# EAGLE board mono main V3 (EAGLE 7.4.0)
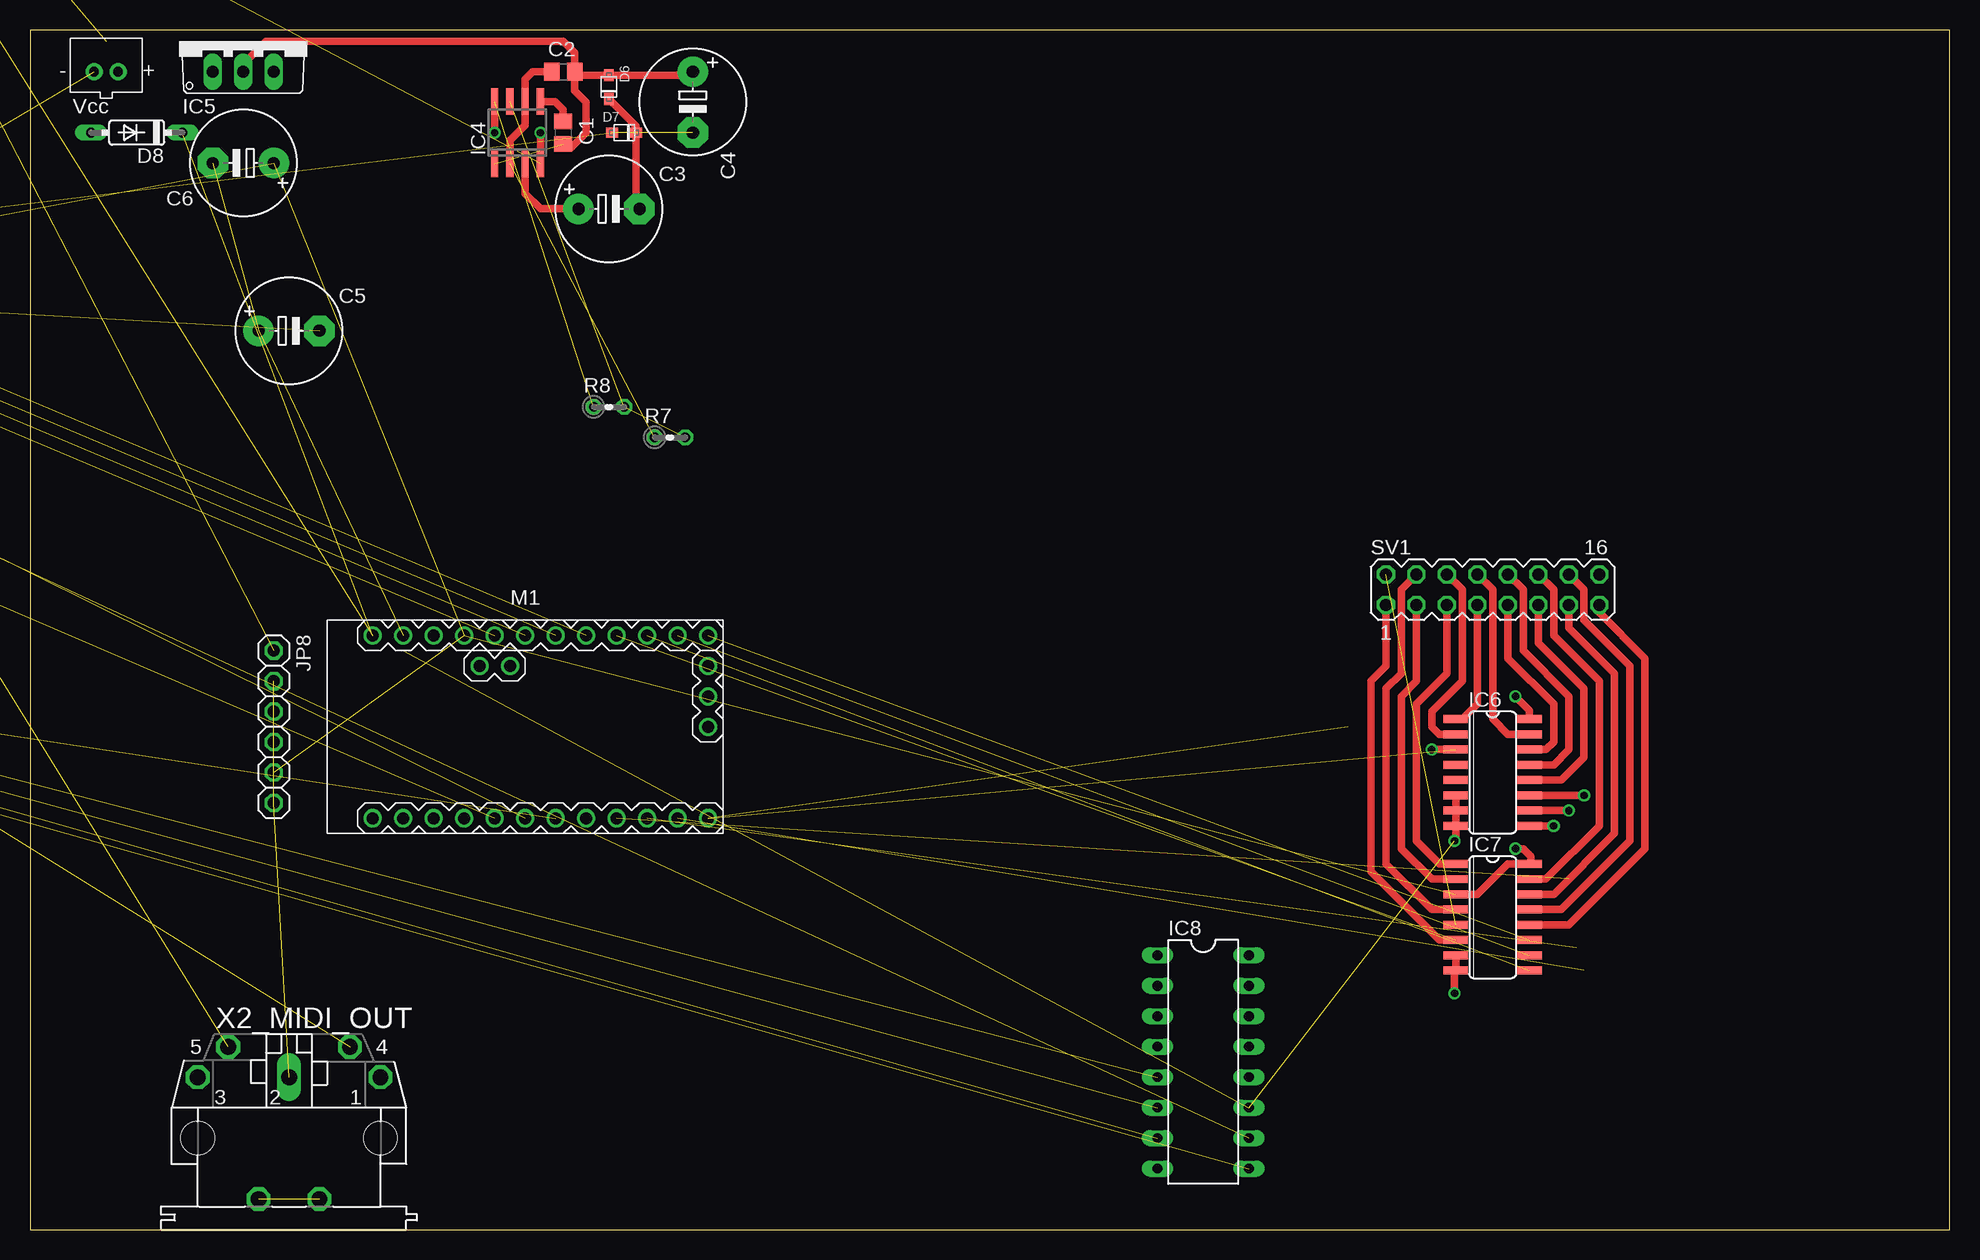
[diagram p0: board, top side]
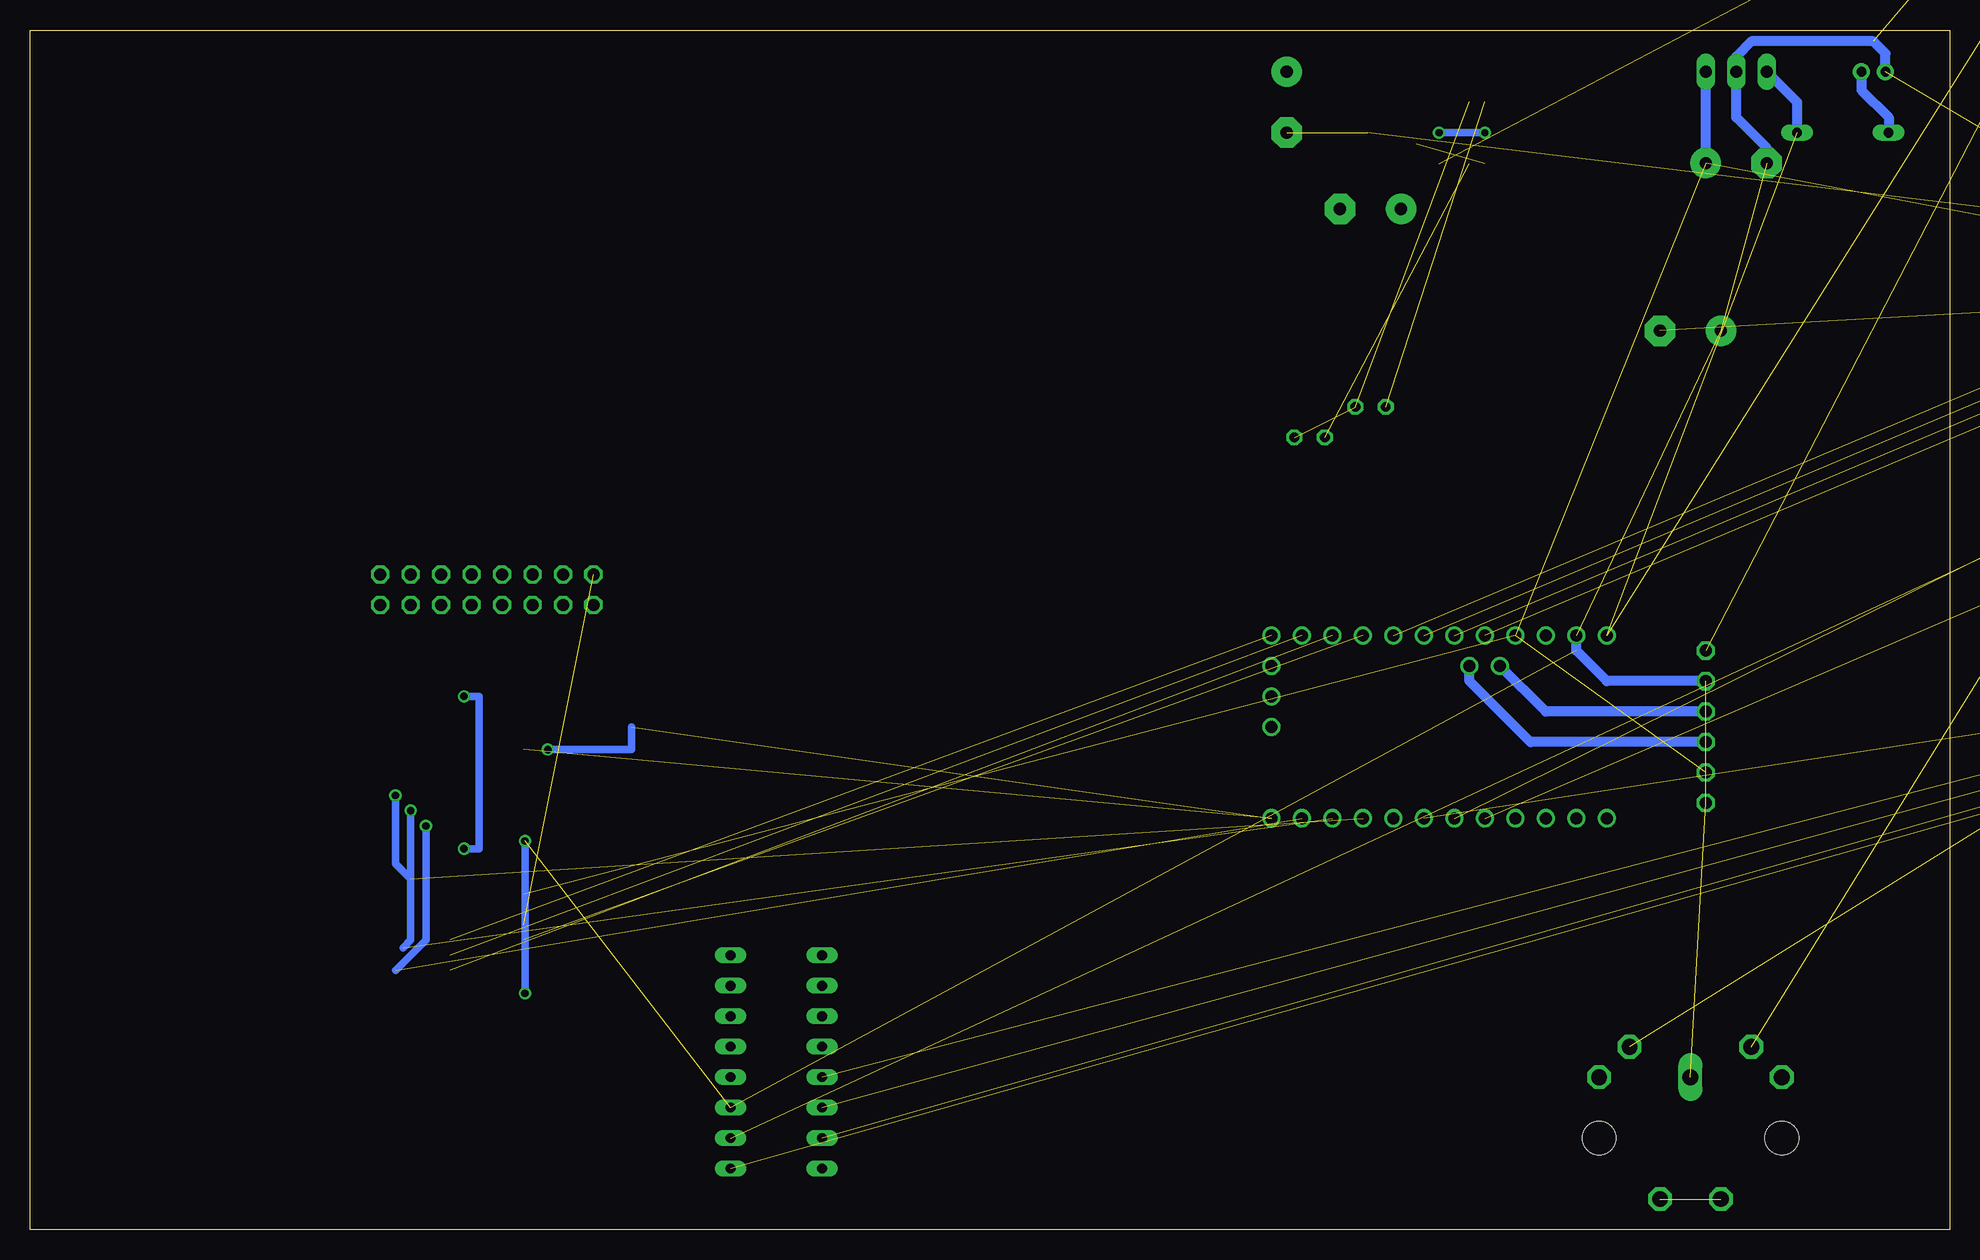
[diagram p1: board, bottom side, seen from below]

Size 160 x 100 mm. Coordinates in mm from the lower left corner, seen from the top.
Outline: 0,0 160,0 160,100 0,100 0,0
Copper layers (1*16): Top 0.035mm / dielectric 1.5mm / Bottom 0.035mm
Design rules "default": minimum track width 10mil, minimum drill 24mil, track to track 8mil, track to pad 8mil, pad to pad 8mil, via to via 8mil, smd to smd 8mil, copper to edge 40mil, drill to drill 8mil, minimum pad ring 10mil, minimum via ring 8mil, stop-mask expansion 4mil, vias tented up to drill 0mil, thermal gap 10mil

## Footprints (pad centres in the part's own frame; a part is rotated, then mirrored left to right if it is on the bottom)
C0805 = smd 1.3 x 1.5: 1 -0.95,0; 2 0.95,0
E5-8,5 = drill 1.016 pad 2.54: + -2.54,0 | drill 1.016 pad 2.54 octagon: - 2.54,0
JST-PH-2-THM = drill 0.8 pad 1.422: 1 1,0; 2 -1,0
DO35-7 = drill 0.813 long: A 3.81,0; C -3.81,0
ZDIO-7.5 = drill 0.813 octagon: A 3.81,0; C -3.81,0
SOD-323F = smd 1 x 0.8: A -1,0; C 1,0
SO14 = smd 0.6 x 2.2: 1 -3.81,-2.6; 2 -2.54,-2.6; 3 -1.27,-2.6; 4 0,-2.6; 5 1.27,-2.6; 6 2.54,-2.6; 7 3.81,-2.6; 8 3.81,2.6; 9 2.54,2.6; 10 1.27,2.6; 11 0,2.6; 12 -1.27,2.6; 13 -2.54,2.6; 14 -3.81,2.6
SO08 = smd 0.6 x 2.2: 1 -1.905,-2.6; 2 -0.635,-2.6; 3 0.635,-2.6; 4 1.905,-2.6; 5 1.905,2.6; 6 0.635,2.6; 7 -0.635,2.6; 8 -1.905,2.6
TO220V = drill 1.016 long: 1 -2.54,-2.54; 2 0,-2.54; 3 2.54,-2.54
SO16 = smd 0.66 x 2.032: 1 -4.445,-3.073; 2 -3.175,-3.073; 3 -1.905,-3.073; 4 -0.635,-3.073; 5 0.635,-3.073; 6 1.905,-3.073; 7 3.175,-3.073; 8 4.445,-3.073; 9 4.445,3.073; 10 3.175,3.073; 11 1.905,3.073; 12 0.635,3.073; 13 -0.635,3.073; 14 -1.905,3.073; 15 -3.175,3.073; 16 -4.445,3.073
DIL16 = drill 0.813 long: 1 -8.89,-3.81; 2 -6.35,-3.81; 3 -3.81,-3.81; 4 -1.27,-3.81; 5 1.27,-3.81; 6 3.81,-3.81; 7 6.35,-3.81; 8 8.89,-3.81; 9 8.89,3.81; 10 6.35,3.81; 11 3.81,3.81; 12 1.27,3.81; 13 -1.27,3.81; 14 -3.81,3.81; 15 -6.35,3.81; 16 -8.89,3.81
1X01 = drill 1.016 pad 1.93 octagon: 1 0,0
1X06 = drill 1.016 long: 1 -6.35,0; 2 -3.81,0; 3 -1.27,0; 4 1.27,0; 5 3.81,0; 6 6.35,0
1X02 = drill 1.016 long: 1 -1.27,0; 2 1.27,0
1X06' = drill 1.016 octagon: 1 -6.35,0; 2 -3.81,0; 3 -1.27,0; 4 1.27,0; 5 3.81,0; 6 6.35,0
1X03 = drill 1.016: 1 -2.54,0; 2 0,0; 3 2.54,0
ARDUINO-PRO-MINI#NP = drill 1: J2.1 -1.27,5.08; J2.2 -3.81,5.08; J3.1 15.24,0; J3.2 15.24,2.54; J3.3 15.24,5.08; J6.1 -12.7,7.62; J6.2 -10.16,7.62; J6.3 -7.62,7.62; J6.4 -5.08,7.62; J6.5 -2.54,7.62; J6.6 0,7.62; J6.7 2.54,7.62; J6.8 5.08,7.62; J6.9 7.62,7.62; J6.10 10.16,7.62; J6.11 12.7,7.62; J6.12 15.24,7.62; J7.1 15.24,-7.62; J7.2 12.7,-7.62; J7.3 10.16,-7.62; J7.4 7.62,-7.62; J7.5 5.08,-7.62; J7.6 2.54,-7.62; J7.7 0,-7.62; J7.8 -2.54,-7.62; J7.9 -5.08,-7.62; J7.10 -7.62,-7.62; J7.11 -10.16,-7.62; J7.12 -12.7,-7.62
0204V = drill 0.813 octagon: 1 -1.27,0; 2 1.27,0
0204/7 = drill 0.813 octagon: 1 -3.81,0; 2 3.81,0
0207/10 = drill 0.813 octagon: 1 -5.08,0; 2 5.08,0
MA08-2 = drill 1.016 octagon: 1 -8.89,-1.27; 2 -8.89,1.27; 3 -6.35,-1.27; 4 -6.35,1.27; 5 -3.81,-1.27; 6 -3.81,1.27; 7 -1.27,-1.27; 8 -1.27,1.27; 9 1.27,-1.27; 10 1.27,1.27; 11 3.81,-1.27; 12 3.81,1.27; 13 6.35,-1.27; 14 6.35,1.27; 15 8.89,-1.27; 16 8.89,1.27
6MM = drill 1 pad 1.676 octagon: A -2.5,-2.5; E 2.5,-2.5; S 0,2.5
MAB5SH = drill 1.321 octagon: 1 7.62,5.08; 3 -7.62,5.08; 4 5.08,7.62; 5 -5.08,7.62; PE -2.54,-5.08; PE@ 2.54,-5.08 | drill 1.321 long: 2 0,5.08 | hole 2.794: 7.62,0; -7.62,0

## Placement (x,y rotation side)
C1  [C0805]  44.45,91.44 270 top
C2  [C0805]  44.45,96.52 0 top
C3  47u  [E5-8,5]  48.26,85.09 0 top
C4  47  [E5-8,5]  55.24,93.98 270 top
C5  [E5-8,5]  21.59,74.93 0 top
C6  [E5-8,5]  17.78,88.9 180 top
CN1  Vcc  [JST-PH-2-THM]  6.35,96.52 0 top
D1  1N4148  [DO35-7]  -29.21,67.31 0 top  (outside the outline)
D2  1N4148  [DO35-7]  -41.91,67.31 0 top  (outside the outline)
D3  1N4148  [DO35-7]  -54.61,67.31 0 top  (outside the outline)
D4  1N4148  [DO35-7]  -67.31,67.31 0 top  (outside the outline)
D5  [ZDIO-7.5]  -46.99,78.74 0 top  (outside the outline)
D6  4148  [SOD-323F]  48.26,95.25 270 top
D7  1N4148  [SOD-323F]  49.53,91.44 0 top
D8  4148  [DO35-7]  8.89,91.44 180 top
D9  1N4148  [DO35-7]  -44.45,73.66 0 top  (outside the outline)
D10  1N4148  [DO35-7]  -57.15,73.66 0 top  (outside the outline)
IC3  TL084D  [SO14]  -15.24,121.92 0 top  (outside the outline)
IC4  NE555D  [SO08]  40.64,91.44 0 top
IC5  7805  [TO220V]  17.78,99.06 0 top
IC6  4051D  [SO16]  121.92,38.1 270 top
IC7  4051D  [SO16]  121.92,26.04 270 top
IC8  4040N  [DIL16]  97.79,13.97 270 top
JP1  CK_O  [1X01]  -62.23,59.69 0 top  (outside the outline)
JP2  GATE  [1X01]  -68.58,59.69 0 top  (outside the outline)
JP3  CV  [1X01]  -77.47,59.69 0 top  (outside the outline)
JP4  [1X06]  -26.67,78.74 0 top  (outside the outline)
JP6  [1X02]  -38.1,78.74 0 top  (outside the outline)
JP7  CK_ division_rotor  [1X06]  -58.42,50.8 0 top  (outside the outline)
JP8  DAC  [1X06']  20.32,41.91 270 top
JP9  pitch_bend  [1X03]  -19.05,59.69 0 top  (outside the outline)
JP10  expression  [1X03]  -29.21,59.69 0 top  (outside the outline)
JP11  CV_Bend  [1X01]  -40.64,59.69 0 top  (outside the outline)
JP12  Exp_out  [1X01]  -48.26,59.69 0 top  (outside the outline)
JP13  Bend  [1X01]  -73.66,59.69 0 top  (outside the outline)
JP14  Exp_IN  [1X01]  -55.88,59.69 0 top  (outside the outline)
M1  ARDUINO-PRO-MINI-5.0V#NP  [ARDUINO-PRO-MINI#NP]  41.27,41.91 0 top
R1  330  [0204V]  -66.04,73.66 0 top  (outside the outline)
R2  330  [0204/7]  -30.48,85.09 0 top  (outside the outline)
R3  330  [0204/7]  -40.64,85.09 0 top  (outside the outline)
R4  300  [0204/7]  -50.8,85.09 0 top  (outside the outline)
R5  10k  [0204/7]  -60.96,85.09 0 top  (outside the outline)
R6  1k  [0204/7]  -71.12,85.09 0 top  (outside the outline)
R7  10k  [0204V]  53.34,66.04 0 top
R8  10k  [0204V]  48.26,68.58 0 top
R9  470  [0204V]  -86.36,74.93 0 top  (outside the outline)
R10  100  [0204/7]  -81.28,85.09 0 top  (outside the outline)
R11  10k  [0204V]  -15.24,80.01 0 top  (outside the outline)
R12  10k  [0207/10]  -74.93,78.74 0 top  (outside the outline)
R13  10k  [0207/10]  -19.05,85.09 0 top  (outside the outline)
R14  10k  [0204/7]  -17.78,90.17 0 top  (outside the outline)
R15  10k  [0204/7]  -27.94,90.17 0 top  (outside the outline)
SV1  keyboard connector  [MA08-2]  121.92,53.34 0 top
TM1  [6MM]  -63.5,40.64 0 top  (outside the outline)
TM2  [6MM]  -71.12,40.64 0 top  (outside the outline)
TM3  50k  [6MM]  -40.64,30.48 0 top  (outside the outline)
X2_MIDI_OUT  MAB5SH  [MAB5SH]  21.59,7.62 0 top

## Library data of the parts
C1-C6 R1 R2 R5-R9 R11-R13 = rcl
CN1 D6 D7 JP1-JP3 JP8-JP14 TM1-TM3 = adafruit
D1-D5 D8-D10 = diode
IC3-IC5 = linear
IC6-IC8 = 40xx
JP4 JP6 JP7 = pinhead
M1 = diy-modules
R3 R4 R10 R14 R15 = eagle-ltspice; SPICEMODEL: NONE; SPICEPREFIX: R
SV1 = con-lstb; OC_FARNELL: unknown; OC_NEWARK: unknown
X2_MIDI_OUT = con-hirschmann; OC_FARNELL: 809883; OC_NEWARK: unknown

## Nets
-3V: C5.- D5.A R9.2 TM2.A
AGND: C1.2 C2.2 C4.+ C5.+ C6.- CN1.2 D3.A D4.A D5.C D6.A D10.A IC3.11 IC4.1 IC5.2 IC6.6 IC6.7 IC6.8 IC7.7 IC7.8 IC8.11 JP8.2 JP8.6 JP10.1 M1.J6.2 R5.1 R6.1 R12.1 R13.2 X2_MIDI_OUT.2
ARP_ENABLE: JP4.4 M1.J6.7 R6.2
ARP_MODE: JP4.5 M1.J6.8
CK_I: JP7.1 M1.J7.6
CK_O: D2.A D4.C JP6.2 M1.J7.8 R3.2
CK_RATE: JP4.3 M1.J6.6
CV: IC3.3 JP8.1
GATE: D1.A D3.C M1.J7.7 R4.2
GND: JP4.6
GND.1: M1.J7.9
MIDI_O: M1.J7.12
N$14: R2.1
N$15: JP3.1 R10.2
N$16: JP1.1 R3.1
N$22: IC8.9 JP7.3
N$23: IC8.7 JP7.4
N$24: IC8.6 JP7.5
N$25: IC8.5 JP7.6
N$26: D9.A D10.C IC8.10 JP6.1 JP7.2
N$28: JP2.1 R4.1
N$30: R2.2 X2_MIDI_OUT.5
N$31: R1.1 X2_MIDI_OUT.4
N$33: IC3.9 R13.1 TM3.A
N$40: IC4.7 R7.2 R8.2
N$41: C2.1 IC4.2 IC4.6 R7.1
N$42: C1.1 IC4.5
N$43: IC3.1 IC3.2 R10.1 R15.2
N$44: C3.+ IC4.3
N$45: C3.- D6.C D7.C
N$46: C4.- D7.A R9.1
N$48: IC3.12 JP9.2
N$49: IC3.13 IC3.14 JP13.1 R14.2
N$50: JP9.3 TM1.A
N$51: IC3.10 JP10.2
N$52: IC3.8 JP12.1 TM3.E TM3.S
N$53: CN1.1 D8.A
N$54: JP9.1 TM2.S
N$55: IC3.6 R11.2 R12.2
N$56: IC3.7 JP11.1 R11.1
N$60: IC3.5 R14.1 R15.1
N$61: JP10.3 JP14.1
NC: SV1.16
OCT_SEL: JP4.2 M1.J6.5
PE: X2_MIDI_OUT.PE X2_MIDI_OUT.PE@
R1: IC6.2 SV1.6
R2: IC6.1 SV1.7
R3: IC6.15 SV1.8
R4: IC6.14 SV1.9
R5: IC6.13 SV1.10
R6: IC6.12 SV1.11
R_MUX: IC6.3 M1.J7.1 R5.2
R_MUX_A: IC6.11 M1.J7.4
R_MUX_B: IC6.10 M1.J7.3
R_MUX_C: IC6.9 M1.J7.2
SCK: JP8.3 M1.J2.2
SDA: JP8.4 M1.J2.1
VCC: C6.+ D1.C D2.C D9.C IC5.3 IC6.16 IC7.3 IC7.16 JP4.1 JP8.5 M1.J6.4 R1.2 TM1.S
VCC_RAW: D8.C IC3.4 IC4.4 IC4.8 IC5.1 M1.J6.1 R8.1
VDD: IC8.16
VSS: IC8.8
W1: IC7.6 M1.J6.9 SV1.1
W2: IC7.5 SV1.2
W3: IC7.2 SV1.3
W4: IC7.4 SV1.4
W5: IC7.1 SV1.5
W6: IC7.15 SV1.12
W7: IC7.14 SV1.13
W8: IC7.13 SV1.14
W9: IC7.12 SV1.15
W_MUX: M1.J7.5
W_MUX_A: IC7.11 M1.J6.12
W_MUX_B: IC7.10 M1.J6.11
W_MUX_C: IC7.9 M1.J6.10

## Tracks (layer width: path | path; a pad name or v marks a point on that pad's centre or on a via)
-3V  (3 unrouted)
AGND  (via drill 0.6)  (17 unrouted)
  Top 0.61: C2.2 45.4,94.94 46.35,93.98 46.35,91.44 45.09,90.17 44.77,90.17 C1.2 | C2.2 45.4,98.11 44.45,99.06 19.68,99.06 17.78,97.16 IC5.2 | C2.2 45.67,96.25 D6.A 54.98,96.25 C4.+ | IC6.6 IC6.7 IC6.8 118.85,32.49 v118.75,32.38 | IC7.7 IC7.8 118.75,21.49 v118.75,19.68
  Bottom 0.61: v118.75,32.38 v118.75,19.68
  Bottom 0.813: CN1.2 5.35,98.06 6.35,99.06 16.51,99.06 17.78,97.79 IC5.2 17.78,92.71 15.24,90.17 C6.- | JP8.2 28.57,45.72 31.11,48.26 M1.J6.2
ARP_ENABLE  (2 unrouted)
ARP_MODE  (1 unrouted)
CK_I  (1 unrouted)
CK_O  (4 unrouted)
CK_RATE  (1 unrouted)
CV  (1 unrouted)
GATE  (3 unrouted)
N$15  (1 unrouted)
N$16  (1 unrouted)
N$22  (1 unrouted)
N$23  (1 unrouted)
N$24  (1 unrouted)
N$25  (1 unrouted)
N$26  (4 unrouted)
N$28  (1 unrouted)
N$30  (1 unrouted)
N$31  (1 unrouted)
N$33  (2 unrouted)
N$40  (2 unrouted)
N$41  (1 unrouted)
  Top 0.61: IC4.2 40.01,90.81 41.27,92.08 IC4.6 41.27,95.89 41.91,96.52 C2.1
N$42
  Top 0.61: IC4.5 43.76,94.04 44.45,93.34 C1.1
N$43  (3 unrouted)
N$44
  Top 0.61: IC4.3 41.27,86.36 42.55,85.09 C3.+
N$45
  Top 0.61: D6.C 50.53,91.98 D7.C 50.53,85.36 C3.-
N$46  (2 unrouted)
N$48  (1 unrouted)
N$49  (3 unrouted)
N$50  (1 unrouted)
N$51  (1 unrouted)
N$52  (3 unrouted)
N$53
  Bottom 0.813: CN1.1 7.35,94.98 5.08,92.71 D8.A
N$54  (1 unrouted)
N$55  (2 unrouted)
N$56  (2 unrouted)
N$60  (2 unrouted)
N$61  (1 unrouted)
OCT_SEL  (1 unrouted)
PE  (1 unrouted)
R1
  Top 0.61: SV1.6 119.38,53.34 119.38,45.72 116.84,43.18 116.84,41.91 117.47,41.27 IC6.2
R2
  Top 0.61: SV1.7 120.65,43.81 119.38,42.55 IC6.1
R3
  Top 0.61: SV1.8 121.92,53.34 121.92,42.55 123.19,41.27 IC6.15
R4
  Top 0.61: SV1.9 123.19,47.62 127,43.81 127,40.64 126.36,40.01 IC6.14
R5
  Top 0.61: SV1.10 124.46,53.34 124.46,48.26 128.27,44.45 128.27,40.01 127,38.73 IC6.13
R6
  Top 0.61: SV1.11 125.73,48.9 129.54,45.09 129.54,39.37 127.64,37.47 IC6.12
R_MUX  (via drill 0.6)  (2 unrouted)
  Top 0.61: IC6.3 v116.84,40.01
  Bottom 0.61: v116.84,40.01 109.86,40.01 109.86,41.91
R_MUX_A  (via drill 0.6)  (1 unrouted)
  Top 0.61: IC6.11 v129.54,36.2
  Bottom 0.61: v129.54,36.2 129.54,30.48 128.27,29.21
R_MUX_B  (via drill 0.6)  (1 unrouted)
  Top 0.61: IC6.10 v128.27,34.92
  Bottom 0.61: v128.27,34.92 128.27,24.13 128.91,23.5
R_MUX_C  (via drill 0.6)  (1 unrouted)
  Top 0.61: IC6.9 v127,33.66
  Bottom 0.61: v127,33.66 127,24.13 129.54,21.59
SCK
  Bottom 0.813: JP8.3 33.66,43.18 M1.J2.2
SDA
  Bottom 0.813: JP8.4 34.92,40.64 40.01,45.72 M1.J2.1
VCC  (via drill 0.6)  (9 unrouted)
  Top 0.61: IC6.16 124.99,43.28 v123.83,44.45 | v123.83,31.75 124.46,31.75 125.09,31.11 125.09,30.58 IC7.16 123.19,30.48 120.65,27.94 IC7.3
  Bottom 0.61: v123.83,44.45 122.56,44.45 122.56,31.75 v123.83,31.75
  Bottom 0.813: C6.+ IC5.3
VCC_RAW  (via drill 0.6)  (4 unrouted)
  Top 0.61: IC4.8 v38.73,91.44 | v42.55,91.44 IC4.4
  Bottom 0.61: v38.73,91.44 v42.55,91.44
  Bottom 0.813: D8.C 12.7,93.98 IC5.1
W1  (1 unrouted)
  Top 0.61: SV1.1 113.03,46.99 111.76,45.72 111.76,29.84 117.47,24.13 IC7.6
W2  (1 unrouted)
W3
  Top 0.61: IC7.2 116.84,29.21 114.3,31.75 114.3,44.45 115.57,45.72 SV1.3
W4
  Top 0.61: SV1.4 114.3,53.34 114.3,46.35 113.03,45.09 113.03,30.48 116.84,26.67 IC7.4
W5
  Top 0.61: SV1.5 118.11,46.35 115.57,43.81 115.57,32.38 117.47,30.48 IC7.1
W6
  Top 0.61: SV1.12 127,53.34 127,49.53 130.81,45.72 130.81,33.66 126.36,29.21 IC7.15
W7
  Top 0.61: SV1.13 128.27,50.16 132.08,46.35 132.08,33.02 127,27.94 IC7.14
W8
  Top 0.61: IC7.13 127.64,26.67 133.35,32.38 133.35,46.99 129.54,50.8 129.54,53.34 SV1.14
W9
  Top 0.61: SV1.15 130.81,51.44 134.62,47.62 134.62,31.75 128.27,25.4 IC7.12
W_MUX_A  (1 unrouted)
W_MUX_B  (1 unrouted)
W_MUX_C  (1 unrouted)